# Altium PCB PCB2.PcbDoc (part 2 of 2)
Units mm, origin at the board's own origin, x right, y up, seen from the top; angles counter-clockwise.
Board outline 39.5 x 39.5 mm, 4 copper layers (Top Layer, Mid Layer 1, Mid Layer 2, Bottom Layer), stack 1.57 mm thick; 82 components, 63 nets, 381 pads, 150 vias.
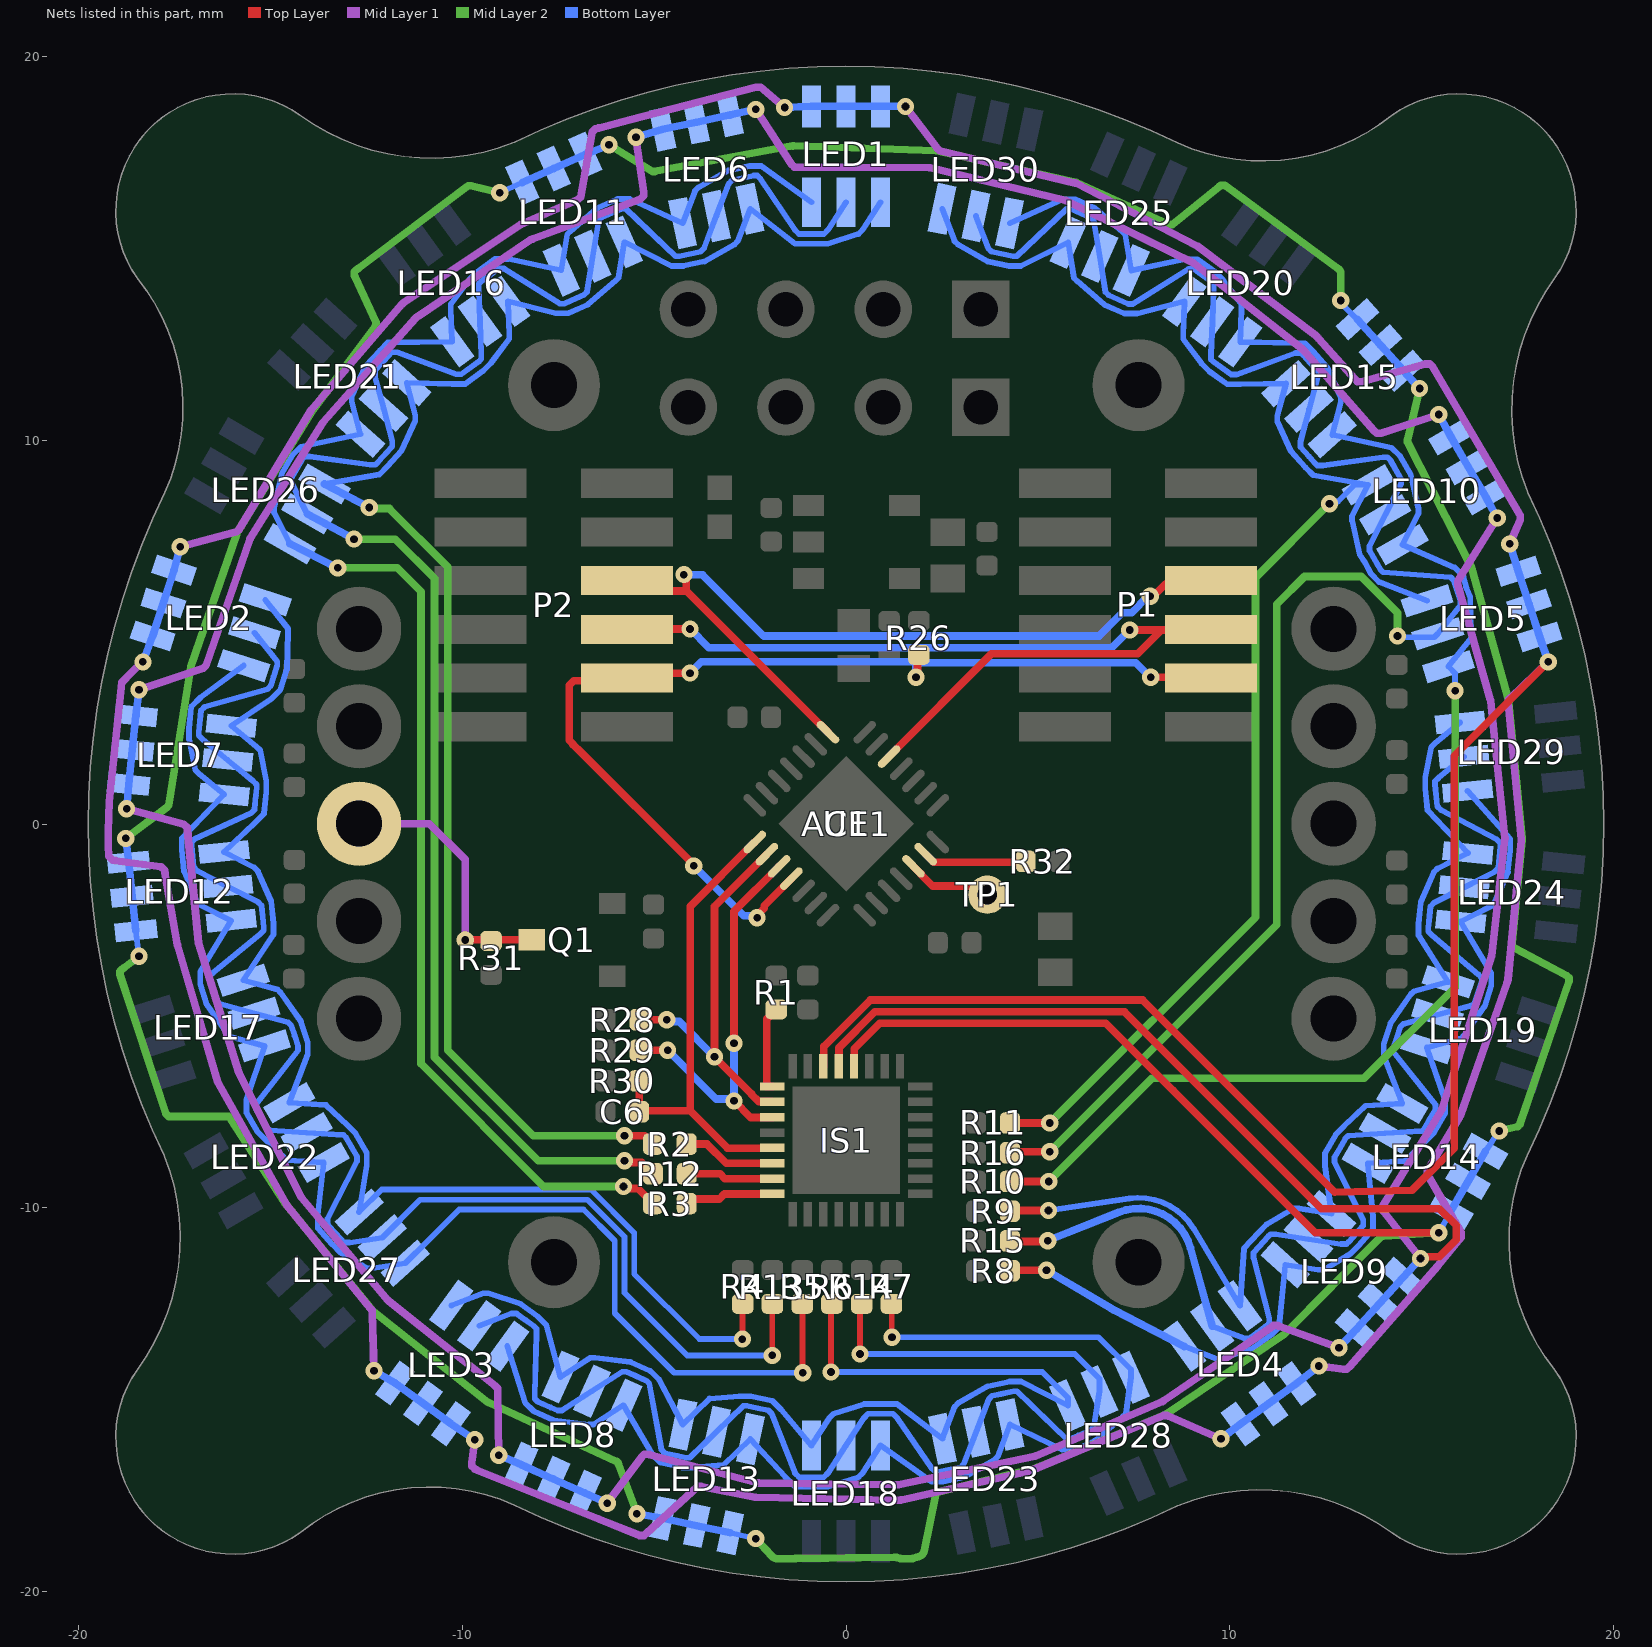
[diagram p4: the nets of this part, all layers, seen from the top]

## Via types
v1: diameter 0.45, hole 0.2, Top Layer to Bottom Layer, 136 vias
v2: diameter 5.5, hole 3, Top Layer to Bottom Layer, 4 vias
v3: diameter 0.5, hole 0.2, Top Layer to Bottom Layer, 4 vias
v4: diameter 0.66, hole 0.33, Top Layer to Bottom Layer, tented top, 4 vias
v5: diameter 0.6, hole 0.3, Top Layer to Bottom Layer, 1 vias
v6: diameter 0.7, hole 0.5, Top Layer to Bottom Layer, 1 vias

## Nets (pads, with @x,y where several pads share a name; then routed paths per layer and width w, separated by ;. In a path a pad name is that pad's centre, name@x,y a point inside that pad or via, vN(x,y) a via of type N, cw(c..) or ccw(c..) an arc to the next point about the centre after c; other vN are vias at no path point) (continued)
NetIS1_20: IS1.20 LED11.1 LED11.3 LED11.5 LED12.1 LED12.3 LED12.5 LED13.1 LED13.3 LED13.5 LED14.1 LED14.3 LED14.5 LED15.1 LED15.3 LED15.5 | length 141
  Top Layer w0.2: IS1.20@0.208,-6.317 0.218,-6.307 0.218,-5.854 0.88,-5.192 6.771,-5.192 8.52,-6.942 12.228,-10.65 v1(15.45,-10.65)
  Mid Layer 2 w0.2: v1(-18.775,-0.375) -17.698,0.439 -17.69,0.445 -17.648,0.487 -17.077,4.087 -17.075,4.1 -15.88,7.559 -15.875,7.575 -13.929,10.744 -13.925,10.75 -12.279,12.953 -12.249,12.993 -12.249,13.076 -12.799,14.265 -12.813,14.295 -12.813,14.39 -12.762,14.442 -12.713,14.478 -9.882,16.607 -9.842,16.637 -9.774,16.637 v1(-9.025,16.45) ; v1(-18.425,-3.45) -18.825,-3.754 -18.873,-3.791 -18.924,-3.842 -18.924,-3.929 -18.916,-3.952 -17.723,-7.556 -17.654,-7.625 -16.095,-7.625 -16.039,-7.68 -16.031,-7.694 -14.625,-9.875 -14.62,-9.881 -12.331,-12.693 -12.319,-12.705 -12.312,-12.71 -9.325,-15.075 -9.309,-15.083 -5.982,-16.61 -5.94,-16.653 -5.928,-16.683 v1(-5.45,-17.975) ; v1(-6.175,17.7) -5.074,17.03 -5.038,17.008 -4.982,17.008 -1.391,17.672 -1.377,17.675 -1.361,17.675 2.361,17.55 2.375,17.55 2.431,17.537 5.985,16.728 6,16.725 8.391,15.638 8.42,15.625 8.506,15.625 9.729,16.616 cw(c9.824,16.5) 9.913,16.62 12.835,14.466 cw(c12.747,14.344) 12.897,14.345 ; v1(-2.35,-18.625) -1.932,-19.085 ; -1.931,-19.085 ccw(c-1.784,-18.95) -1.782,-19.15 -1.769,-19.15 cw(c-1.766,-19.35) -1.757,-19.15 -1.717,-19.152 ccw(c-1.708,-18.952) -1.709,-19.152 -1.409,-19.152 ccw(c-1.409,-18.952) -1.39,-19.151 -1.326,-19.145 cw(c-1.307,-19.344) -1.309,-19.144 1.263,-19.111 cw(c1.266,-19.311) 1.321,-19.118 1.414,-19.145 ccw(c1.469,-18.952) 1.468,-19.152 1.68,-19.152 ccw(c1.68,-18.952) 1.743,-19.142 1.83,-19.113 cw(c1.894,-19.302) 1.845,-19.108 1.891,-19.097 ccw(c1.842,-18.903) 2.037,-18.944 2.34,-17.474 2.401,-17.412 2.442,-17.402 4.975,-16.775 4.985,-16.771 8.35,-15.375 8.362,-15.367 11.425,-13.3 11.435,-13.289 13.91,-10.79 13.95,-10.75 14.007,-10.746 v1(15.45,-10.65) ; v1(12.897,13.646) 12.897,14.344 ; v1(14.95,11.35) 14.638,10.029 14.634,10.012 14.634,9.958 16.293,6.713 16.3,6.7 16.31,6.666 17.271,3.213 17.275,3.2 17.277,3.18 17.624,-0.385 17.624,-0.393 17.624,-0.407 17.36,-3.099 17.359,-3.107 17.359,-3.176 17.419,-3.236 18.761,-3.94 18.781,-3.951 18.841,-4.011 18.841,-4.098 17.577,-7.797 17.565,-7.83 17.511,-7.884 v1(17.025,-8)
  Bottom Layer w0.15: LED12.1@-18.51,-2.783 v1(-18.425,-3.45) ; v1(-9.025,16.45) LED11.1@-8.438,16.717 ; LED13.1@-3.013,-18.473 v1(-2.35,-18.625) ; v1(12.897,13.646) 12.897,13.58 LED15.1@13.325,13.152 ; v1(15.45,-10.65) LED14.5@15.764,-10.093 ; LED14.1@16.664,-8.534 v1(17.025,-8)
  Bottom Layer w0.2: v1(-18.775,-0.375) LED12.5@-18.698,-0.993 LED12.3@-18.604,-1.888 LED12.1@-18.51,-2.783 ; LED11.1@-8.438,16.717 LED11.3@-7.615,17.083 LED11.5@-6.793,17.449 v1(-6.175,17.7) ; v1(-5.45,-17.975) LED13.5@-4.774,-18.099 LED13.3@-3.893,-18.286 LED13.1@-3.013,-18.473 ; LED15.1@13.325,13.152 LED15.3@13.927,12.483 LED15.5@14.53,11.814 v1(14.95,11.35) ; LED14.5@15.764,-10.093 LED14.3@16.214,-9.313 LED14.1@16.664,-8.534
NetIS1_21: IS1.21 LED6.1 LED6.3 LED6.5 LED7.1 LED7.3 LED7.5 LED8.1 LED8.3 LED8.5 LED9.1 LED9.3 LED9.5 LED10.1 LED10.3 LED10.5 | length 140.8
  Top Layer w0.2: IS1.21@-0.192,-6.317 -0.182,-6.307 -0.182,-5.827 0.755,-4.891 7.257,-4.891 12.391,-10.025 15.464,-10.025 15.902,-10.463 15.902,-10.837 15.462,-11.277 15.023,-11.277 v1(14.975,-11.325)
  Mid Layer 1 w0.2: v1(-18.75,0.4) -17.257,-0.003 -17.169,-0.091 -17.162,-0.163 -16.875,-3.1 -16.869,-3.12 -15.825,-6.475 -15.818,-6.49 -14.2,-9.725 -14.185,-9.743 -11.932,-12.416 -11.918,-12.43 -11.91,-12.437 -9.14,-14.648 -9.075,-14.713 -9.074,-14.794 v1(-9.05,-16.45) ; v1(-18.425,3.5) -16.793,4.044 -16.749,4.059 -16.683,4.125 -15.532,7.429 -15.525,7.45 -13.634,10.461 -13.625,10.475 -11.216,13.182 -11.213,13.186 -11.195,13.203 -11.129,13.249 -8.245,15.211 -8.225,15.225 -8.168,15.246 -5.401,16.269 -5.36,16.284 -5.271,16.374 -5.271,16.471 v1(-5.475,17.9) ; v1(-6.225,-17.7) -5.322,-16.496 -5.254,-16.428 -5.145,-16.428 -5.12,-16.434 -2.3,-17.175 -2.276,-17.175 1.247,-17.224 1.329,-17.225 1.351,-17.225 1.372,-17.22 4.925,-16.475 4.943,-16.467 8.25,-15.05 8.266,-15.039 11.142,-13.073 11.238,-13.073 11.271,-13.084 v1(12.85,-13.65) ; v1(-2.35,18.625) -1.434,17.215 -1.422,17.198 -1.349,17.125 2.177,17.1 2.2,17.1 5.704,16.255 5.725,16.25 9.031,14.634 9.05,14.625 9.076,14.604 11.885,12.387 11.894,12.379 11.908,12.366 ; 11.961,12.305 11.908,12.366 ; v1(14.975,-11.325) 13.993,-10.08 13.993,-9.954 14.023,-9.906 15.5,-7.49 15.525,-7.45 15.532,-7.428 16.804,-3.515 16.825,-3.45 16.827,-3.43 17.174,-0.385 17.174,-0.364 17.173,-0.353 16.803,3.197 16.8,3.225 16.795,3.242 15.942,6.241 15.942,6.327 15.972,6.375 v1(16.975,7.975) ; v1(15.45,10.675) 13.945,10.181 13.83,10.181 13.767,10.244 13.763,10.249 11.908,12.366
  Bottom Layer w0.2: v1(-18.75,0.4) LED7.1@-18.695,1.032 LED7.3@-18.601,1.927 LED7.5@-18.507,2.822 v1(-18.425,3.5) ; v1(-9.05,-16.45) LED8.5@-8.459,-16.7 LED8.3@-7.637,-17.066 LED8.1@-6.814,-17.432 v1(-6.225,-17.7) ; v1(-5.475,17.9) LED6.1@-4.777,18.106 LED6.3@-3.896,18.294 LED6.5@-3.016,18.481 v1(-2.35,18.625) ; v1(12.85,-13.65) LED9.5@13.308,-13.162 LED9.3@13.91,-12.494 LED9.1@14.513,-11.825 v1(14.975,-11.325) ; v1(15.45,10.675) LED10.1@15.77,10.089 LED10.3@16.22,9.309 LED10.5@16.67,8.53 v1(16.975,7.975)
NetIS1_22: IS1.22 LED1.1 LED1.3 LED1.5 LED2.1 LED2.3 LED2.5 LED3.1 LED3.3 LED3.5 LED4.1 LED4.3 LED4.5 LED5.1 LED5.3 LED5.5 | length 156.9
  Top Layer w0.2: IS1.22@-0.592,-6.317 -0.582,-6.307 -0.582,-5.801 0.63,-4.589 7.73,-4.589 12.741,-9.6 14.752,-9.548 15.85,-8.45 15.85,1.775 v1(18.3,4.225)
  Mid Layer 1 w0.2: v1(-18.325,4.225) -18.612,3.952 -18.877,3.687 -19.202,0.587 -19.227,-0.2 -19.227,-0.562 -19.216,-0.838 -19.11,-0.944 -19.043,-0.953 -17.853,-1.114 -17.761,-1.207 -17.75,-1.269 -17.425,-3.15 -17.422,-3.161 -16.375,-6.725 -16.364,-6.745 -14.575,-9.925 -14.564,-9.938 -12.35,-12.675 -12.348,-12.742 v1(-12.3,-14.25) ; v1(-17.35,7.225) -15.928,7.604 -15.876,7.618 -15.821,7.673 -13.959,10.761 -13.95,10.775 -11.568,13.554 -11.563,13.56 -11.543,13.579 -11.477,13.624 -8.49,15.615 -8.475,15.625 -7.023,16.257 -6.988,16.272 -6.917,16.344 -6.623,17.974 -6.612,18.036 -6.529,18.118 -6.451,18.138 -5.626,18.352 -2.35,19.199 -2.326,19.205 -2.227,19.205 v1(-1.6,18.675) ; v1(-9.675,-16.05) -9.744,-16.554 -9.756,-16.634 -9.756,-16.731 -9.668,-16.818 -9.63,-16.833 -6.453,-18.111 -5.455,-18.513 -5.381,-18.543 -5.264,-18.543 -5.207,-18.49 -3.868,-17.266 -3.77,-17.266 -3.75,-17.27 -2.375,-17.55 -2.357,-17.55 1.295,-17.623 1.378,-17.625 1.402,-17.625 1.424,-17.62 4.825,-16.85 4.841,-16.843 8.284,-15.417 8.365,-15.417 8.403,-15.433 v1(9.775,-16.025) ; v1(1.55,18.7) 2.382,17.607 2.39,17.596 2.439,17.547 5.976,16.706 6,16.7 9.16,15.058 9.175,15.05 9.199,15.032 12.235,12.737 12.246,12.728 12.259,12.715 12.314,12.654 13.267,11.592 13.271,11.588 13.333,11.526 13.443,11.526 15.077,11.984 15.103,11.991 15.214,11.991 15.29,11.914 15.331,11.846 17.548,8.087 17.576,8.04 17.576,7.945 v1(17.3,7.3) ; v1(12.325,-14.125) 12.877,-14.201 12.957,-14.212 13.053,-14.212 13.117,-14.149 13.121,-14.144 15.427,-11.512 16.031,-10.776 16.031,-10.648 16.004,-10.602 15.157,-9.131 15.157,-9.022 15.186,-8.974 15.977,-7.663 16,-7.625 16.007,-7.606 17.227,-4.141 17.25,-4.075 17.252,-4.051 17.599,-0.435 17.599,-0.415 17.598,-0.406 17.258,3.138 17.258,3.23 17.319,3.29 17.32,3.292 v1(18.3,4.225)
  Bottom Layer w0.2: v1(-18.325,4.225) LED2.1@-18.071,4.901 LED2.3@-17.793,5.757 LED2.5@-17.515,6.613 v1(-17.35,7.225) ; v1(-12.3,-14.25) LED3.5@-11.754,-14.571 LED3.3@-11.026,-15.1 LED3.1@-10.297,-15.629 v1(-9.675,-16.05) ; v1(-1.6,18.675) LED1.1@-0.9,18.704 LED1.3@0,18.704 LED1.5@0.9,18.704 v1(1.55,18.7) ; v1(9.775,-16.025) LED4.5@10.283,-15.639 LED4.3@11.011,-15.11 LED4.1@11.74,-14.581 v1(12.325,-14.125) ; v1(17.3,7.3) LED5.1@17.523,6.588 LED5.3@17.801,5.732 LED5.5@18.079,4.876 v1(18.3,4.225)
NetIS1_25: IS1.25 R1.1 | length 2.3
  Top Layer w0.2: IS1.25@-1.917,-6.842 -2.057,-6.842 -2.067,-6.832 -2.067,-5.082 -1.978,-4.993 -1.978,-4.99 -1.821,-4.832 R1.1@-1.817,-4.832
NetIS1_30: IS1.30 R2.1 | length 2.4
  Top Layer w0.2: R2.1@-4.152,-8.342 -3.622,-8.342 -3.122,-8.842 IS1.30@-1.917,-8.842
NetIS1_31: IS1.31 R12.1 | length 2.5
  Top Layer w0.2: R12.1@-4.152,-9.117 R12.1@-4.139,-9.117 ; R12.1@-4.147,-9.125 R12.1@-4.139,-9.117 ; R12.1@-3.999,-8.977 R12.1@-4.139,-9.117 ; IS1.31@-1.917,-9.242 -3.158,-9.242 -3.283,-9.117 R12.1@-4.139,-9.117
NetIS1_32: IS1.32 R3.1 | length 2.3
  Top Layer w0.2: R3.1@-4.152,-9.892 -4.035,-9.775 -3.3,-9.775 -3.167,-9.642 IS1.32@-1.917,-9.642
NetLED1_2: LED1.2 LED6.2 LED11.2 LED16.2 LED21.2 LED26.2 R3.2 | length 45.7
  Top Layer w0.2: v1(-5.8,-9.45) -5.752,-9.498 -5.422,-9.498 -5.032,-9.888 R3.2@-5.032,-9.892
  Mid Layer 2 w0.2: v1(-13.25,6.675) -11.7,6.675 -11.075,6.05 -11.075,-6.25 -7.875,-9.45 v1(-5.8,-9.45)
  Bottom Layer w0.15: LED26.2@-14.492,7.303 -14.906,8.118 -14.906,8.239 -14.708,9.122 -14.423,9.616 -14.207,9.832 LED21.2@-12.655,10.16 -12.88,11.005 -12.88,11.146 -12.529,11.919 -12.146,12.344 -11.944,12.546 LED16.2@-10.266,12.57 -10.299,13.42 -10.299,13.551 -9.822,14.184 -9.613,14.393 -9.151,14.729 -8.812,14.729 LED11.2@-7.421,14.433 -7.268,15.364 -7.193,15.439 -6.475,16.057 -5.954,16.289 -5.635,16.289 LED6.2@-4.257,15.661 -3.933,16.505 -3.844,16.594 -3.068,17.033 -2.51,17.151 -2.21,17.151 LED1.2@-0.9,16.204
  Bottom Layer w0.2: LED26.2@-14.492,7.303 v1(-13.25,6.675)
NetLED1_4: LED1.4 LED6.4 LED11.4 LED16.4 LED21.4 LED26.4 R12.2 | length 49.4
  Top Layer w0.2: v1(-5.775,-8.775) -5.727,-8.823 -5.326,-8.823 -5.193,-8.956 -5.19,-8.956 -5.032,-9.113 R12.2@-5.032,-9.117
  Mid Layer 2 w0.2: v1(-12.825,7.425) -11.75,7.425 -10.725,6.4 -10.725,-6.075 -8.025,-8.775 v1(-5.775,-8.775)
  Bottom Layer w0.15: LED26.4@-14.042,8.083 -14.456,8.898 -14.456,9.018 -14.171,9.512 -14.103,9.58 -13.982,9.58 -12.407,9.362 -12.266,9.362 -12.211,9.417 -11.828,9.843 -11.828,9.984 LED21.4@-12.053,10.829 -12.277,11.673 -12.277,11.814 -11.894,12.24 -11.839,12.295 -11.698,12.295 -10.159,11.72 -10.029,11.72 -9.567,12.056 -9.505,12.117 -9.505,12.248 LED16.4@-9.538,13.099 -9.571,13.949 -9.571,14.08 -9.509,14.141 -9.312,14.285 -9.047,14.477 -8.917,14.477 -7.458,13.561 -7.347,13.561 -7.145,13.651 -6.826,13.793 -6.751,13.868 LED11.4@-6.599,14.799 -6.446,15.731 -6.371,15.805 -5.85,16.037 -5.739,16.037 -4.44,14.797 -4.348,14.797 -3.789,14.915 -3.701,15.004 LED6.4@-3.377,15.848 -3.053,16.692 -2.964,16.781 -2.405,16.9 -2.314,16.9 -2.225,16.811 -1.327,15.481 -1.223,15.377 -0.577,15.377 -0.473,15.481 LED1.4@0,16.204
  Bottom Layer w0.2: LED26.4@-14.042,8.083 v1(-12.825,7.425)
NetLED1_6: LED1.6 LED6.6 LED11.6 LED16.6 LED21.6 LED26.6 R2.2 | length 43.8
  Top Layer w0.2: v1(-5.775,-8.125) -5.249,-8.125 R2.2@-5.032,-8.342
  Mid Layer 2 w0.2: v1(-12.425,8.25) -12.396,8.221 -11.9,8.221 -10.377,6.698 -10.377,-5.898 -8.15,-8.125 v1(-5.775,-8.125)
  Bottom Layer w0.15: LED26.6@-13.592,8.862 -12.162,9.111 -11.959,9.313 -11.576,9.739 -11.226,10.512 -11.226,10.653 LED21.6@-11.45,11.497 -10.264,11.469 -9.925,11.469 -9.463,11.804 -9.254,12.013 -8.777,12.646 -8.777,12.777 LED16.6@-8.81,13.628 -7.562,13.309 -7.243,13.309 -6.722,13.541 -6.004,14.159 -5.929,14.234 LED11.6@-5.776,15.165 -4.544,14.545 -4.244,14.545 -3.685,14.664 -2.909,15.103 -2.82,15.191 LED6.6@-2.496,16.035 -1.327,15.126 -0.473,15.126 0.323,15.377 0.427,15.481 LED1.6@0.9,16.204
  Bottom Layer w0.2: LED26.6@-13.592,8.862 v1(-12.425,8.25)
NetLED2_2: LED2.2 LED7.2 LED12.2 LED17.2 LED22.2 LED27.2 R5.2 | length 37.6
  Top Layer w0.15: R5.2@-1.142,-12.507 -1.134,-12.516 -1.134,-14.291 v1(-1.125,-14.3)
  Bottom Layer w0.15: LED2.2@-15.694,4.129 -16.818,3.305 -17.061,3.062 -17.121,2.493 -17.121,2.203 -16.964,1.412 -16.868,1.316 LED7.2@-16.209,0.771 -17.313,-0.374 -17.313,-0.665 -17.253,-1.233 -16.907,-2.024 -16.811,-2.12 LED12.2@-16.024,-2.522 -16.832,-3.859 -16.832,-4.169 -16.656,-4.711 -16.126,-5.463 -16.045,-5.544 LED17.2@-15.152,-5.785 -15.625,-7.196 -15.625,-7.525 -15.34,-8.019 -15.124,-8.235 -14.57,-8.763 LED22.2@-13.609,-8.824 -13.768,-10.185 -13.768,-10.534 -13.385,-10.959 -13.183,-11.162 -12.477,-11.579 -12.336,-11.579 LED27.2@-11.485,-11.45 -10.91,-10.875 -10.08,-10.045 -6.839,-10.045 -6.025,-10.859 -6.025,-12.75 -5.425,-13.35 -4.475,-14.3 v1(-1.125,-14.3)
NetLED2_4: LED2.4 LED7.4 LED12.4 LED17.4 LED22.4 LED27.4 R13.2 | length 40.6
  Top Layer w0.15: v1(-1.925,-13.85) -1.921,-13.846 -1.921,-12.511 R13.2@-1.917,-12.507
  Bottom Layer w0.15: LED2.4@-15.415,4.984 -14.821,4.239 -14.821,4.137 -14.918,3.84 -14.998,3.595 -15.079,3.513 -16.714,3.054 -16.81,2.958 -16.87,2.389 -16.87,2.307 -16.774,2.211 LED7.4@-16.115,1.666 -15.455,1.12 -15.359,1.024 -15.359,0.942 -15.38,0.743 -15.419,0.373 -15.515,0.277 -16.965,-0.382 -17.061,-0.478 -17.061,-0.56 -17.001,-1.129 -16.905,-1.225 LED12.4@-16.118,-1.627 -15.33,-2.029 -15.234,-2.125 -15.203,-2.417 -15.174,-2.693 -15.174,-2.776 -15.27,-2.872 -16.499,-3.882 -16.581,-3.963 -16.581,-4.064 -16.405,-4.607 -16.323,-4.689 LED17.4@-15.431,-4.929 -14.538,-5.17 -14.457,-5.252 -14.371,-5.516 -14.28,-5.794 -14.28,-5.895 -15.374,-7.301 -15.374,-7.421 -15.088,-7.915 -15.02,-7.983 LED22.4@-14.059,-8.045 -13.098,-8.106 -13.03,-8.174 -12.889,-8.418 -12.745,-8.668 -12.745,-8.789 -13.517,-10.289 -13.517,-10.43 -13.361,-10.603 -13.134,-10.855 -13.079,-10.91 -12.938,-10.91 LED27.4@-12.088,-10.782 -11.1,-9.794 -6.734,-9.794 -5.773,-10.755 -5.773,-12.216 -4.137,-13.852 -1.927,-13.852 v1(-1.925,-13.85)
NetLED2_6: LED2.6 LED7.6 LED12.6 LED17.6 LED22.6 LED27.6 R4.2 | length 34.2
  Top Layer w0.15: v1(-2.7,-13.425) -2.696,-13.421 -2.696,-12.511 R4.2@-2.692,-12.507
  Bottom Layer w0.15: LED2.6@-15.137,5.84 -14.543,5.095 -14.543,4.993 -14.57,4.033 -14.746,3.491 -14.975,3.262 LED7.6@-16.02,2.561 -15.361,2.015 -15.265,1.919 -15.108,1.129 -15.108,0.838 -15.168,0.269 -15.411,0.026 LED12.6@-16.212,-0.732 -15.424,-1.134 -15.328,-1.23 -14.983,-2.02 -14.923,-2.589 -14.923,-2.88 LED17.6@-15.709,-4.073 -14.817,-4.314 -14.735,-4.396 -14.205,-5.147 -14.029,-5.69 -14.029,-5.999 LED22.6@-14.509,-7.265 -13.548,-7.326 -12.994,-7.854 -12.778,-8.07 -12.493,-8.564 -12.493,-8.893 LED27.6@-12.69,-10.113 -12.102,-9.525 -6.647,-9.525 -5.522,-10.651 -5.522,-11.725 -3.822,-13.425 v1(-2.7,-13.425)
NetLED3_2: LED3.2 LED8.2 LED13.2 LED18.2 LED23.2 LED28.2 R7.2 | length 29.8
  Top Layer w0.15: R7.2@1.183,-12.507 1.192,-12.516 1.192,-13.367 v1(1.2,-13.375)
  Bottom Layer w0.15: LED3.2@-8.828,-13.606 -8.363,-15.085 -8.141,-15.307 -7.62,-15.539 -6.693,-15.654 -6.583,-15.654 LED8.2@-5.798,-15.148 -5.062,-16.415 -4.826,-16.651 -4.267,-16.77 -3.967,-16.77 -3.191,-16.705 LED13.2@-2.493,-16.028 -1.578,-17.023 -1.327,-17.274 -0.473,-17.274 0.323,-17.023 0.427,-16.919 LED18.2@0.9,-16.196 2.227,-17.14 2.527,-17.14 3.086,-17.021 3.862,-16.582 3.95,-16.493 LED23.2@4.274,-15.649 5.632,-16.303 5.972,-16.303 6.493,-16.071 7.215,-15.449 7.3,-15.364 LED28.2@7.428,-14.422 7.428,-14.219 6.584,-13.375 v1(1.2,-13.375)
NetLED3_4: LED3.4 LED8.4 LED13.4 LED18.4 LED23.4 LED28.4 R14.2 | length 34.3
  Top Layer w0.15: v1(0.367,-13.813) 0.367,-12.548 R14.2@0.408,-12.507
  Bottom Layer w0.15: LED3.4@-9.556,-13.077 -8.721,-12.757 -8.591,-12.757 -8.355,-12.928 -8.129,-13.093 -8.067,-13.154 -8.067,-13.285 -8.111,-14.87 -8.111,-14.981 -8.036,-15.056 -7.697,-15.207 -7.515,-15.288 -7.405,-15.288 LED8.4@-6.62,-14.782 -5.835,-14.276 -5.724,-14.276 -5.486,-14.382 -5.203,-14.508 -5.128,-14.583 -4.81,-16.311 -4.722,-16.399 -4.4,-16.468 -4.163,-16.518 -4.071,-16.518 LED13.4@-3.374,-15.841 -2.676,-15.164 -2.584,-15.164 -2.297,-15.225 -2.026,-15.282 -1.937,-15.371 -1.327,-16.919 -1.223,-17.023 -0.577,-17.023 -0.473,-16.919 LED18.4@0,-16.196 0.473,-15.473 0.577,-15.369 1.223,-15.369 1.327,-15.473 2.243,-16.799 2.331,-16.888 2.423,-16.888 2.981,-16.769 3.07,-16.681 LED23.4@3.394,-15.836 3.718,-14.992 3.807,-14.904 4.039,-14.854 4.365,-14.785 4.457,-14.785 5.747,-16.026 5.857,-16.026 6.051,-15.94 6.378,-15.794 6.453,-15.719 LED28.4@6.606,-14.788 6.606,-14.456 5.963,-13.813 v1(0.367,-13.813)
NetLED3_6: LED3.6 LED8.6 LED13.6 LED18.6 LED23.6 LED28.6 R6.2 | length 29.3
  Top Layer w0.15: v1(-0.392,-14.284) -0.392,-12.532 R6.2@-0.367,-12.507
  Bottom Layer w0.15: LED3.6@-10.284,-12.548 -9.449,-12.228 -9.319,-12.228 -8.487,-12.505 -8.024,-12.841 -7.815,-13.05 LED8.6@-7.442,-14.416 -6.657,-13.91 -6.546,-13.91 -5.62,-14.024 -5.099,-14.256 -4.877,-14.478 LED13.6@-4.254,-15.654 -3.556,-14.976 -2.78,-14.912 -2.48,-14.912 -1.922,-15.031 -1.685,-15.267 LED18.6@-0.9,-16.196 -0.427,-15.473 -0.323,-15.369 0.473,-15.118 1.327,-15.118 LED23.6@2.514,-16.024 2.838,-15.179 2.927,-15.091 3.703,-14.652 4.261,-14.533 4.561,-14.533 LED28.6@5.784,-15.154 5.784,-14.951 5.116,-14.284 v1(-0.392,-14.284)
NetLED4_2: LED4.2 LED9.2 LED14.2 LED19.2 LED24.2 LED29.2 R9.2 | length 28.4
  Top Layer w0.2: R9.2@4.273,-10.092 4.292,-10.073 v1(5.278,-10.073)
  Bottom Layer w0.15: v1(5.278,-10.073) 7.381,-9.762 cw(c7.628,-11.422) 9.067,-10.559 LED4.2@10.27,-12.559 10.372,-11.068 10.755,-10.643 10.957,-10.441 11.664,-10.023 11.805,-10.023 LED9.2@12.655,-10.152 12.482,-8.911 12.482,-8.583 12.768,-8.088 12.983,-7.873 13.537,-7.345 LED14.2@14.499,-7.284 14.015,-6.042 14.015,-5.732 14.191,-5.19 14.721,-4.438 14.803,-4.356 LED19.2@15.695,-4.116 14.921,-2.902 14.921,-2.611 14.98,-2.043 15.326,-1.252 15.422,-1.156 LED24.2@16.21,-0.754 15.158,0.356 15.099,0.925 15.099,1.216 15.256,2.007 15.352,2.103 LED29.2@16.011,2.648
NetLED4_4: LED4.4 LED9.4 LED14.4 LED19.4 LED24.4 LED29.4 R15.2 | length 33.6
  Top Layer w0.2: R15.2@4.273,-10.867 4.286,-10.88 5.241,-10.88 v1(5.261,-10.859)
  Bottom Layer w0.15: LED4.4@9.542,-13.088 10.377,-13.408 10.507,-13.408 10.728,-13.248 10.969,-13.072 11.031,-13.011 11.031,-12.88 10.623,-11.314 10.623,-11.173 10.758,-11.023 11.006,-10.747 11.061,-10.692 11.202,-10.692 LED9.4@12.053,-10.821 12.903,-10.949 13.044,-10.949 13.099,-10.894 13.482,-10.469 13.482,-10.328 12.734,-8.807 12.734,-8.687 12.856,-8.475 13.019,-8.193 13.087,-8.124 LED14.4@14.049,-8.063 15.01,-8.002 15.078,-7.934 15.21,-7.704 15.363,-7.44 15.363,-7.319 14.267,-5.938 14.267,-5.837 14.351,-5.577 14.443,-5.294 14.525,-5.212 LED19.4@15.417,-4.972 16.309,-4.731 16.391,-4.649 16.502,-4.308 16.567,-4.107 16.567,-4.006 16.485,-3.924 15.268,-2.894 15.172,-2.798 15.172,-2.716 15.205,-2.404 15.232,-2.147 15.328,-2.051 LED24.4@16.115,-1.649 16.903,-1.247 16.999,-1.151 17.059,-0.583 17.059,-0.5 16.963,-0.404 15.506,0.365 15.41,0.461 15.35,1.029 15.35,1.112 15.446,1.208 LED29.4@16.105,1.753
  Bottom Layer w0.2: v1(5.261,-10.859) 7.107,-10.121 cw(c7.628,-11.422) 8.979,-11.05 LED4.4@9.542,-13.088
NetLED4_6: LED4.6 LED9.6 LED14.6 LED19.6 LED24.6 LED29.6 R8.2 | length 27.1
  Top Layer w0.2: R8.2@4.273,-11.642 4.298,-11.667 4.332,-11.633 v1(5.226,-11.633)
  Bottom Layer w0.15: LED4.6@8.814,-13.617 9.649,-13.937 9.779,-13.937 10.611,-13.66 11.074,-13.324 11.283,-13.115 LED9.6@11.45,-11.49 12.3,-11.618 12.441,-11.618 13.148,-11.201 13.35,-10.999 13.733,-10.573 13.733,-10.224 LED14.6@13.599,-8.843 14.56,-8.781 15.114,-8.253 15.329,-8.038 15.615,-7.544 15.615,-7.215 LED19.6@15.139,-5.828 16.031,-5.587 16.113,-5.505 16.642,-4.753 16.819,-4.211 16.819,-3.901 LED24.6@16.021,-2.544 16.809,-2.142 16.905,-2.046 17.251,-1.256 17.31,-0.687 17.31,-0.396 LED29.6@16.199,0.858
  Bottom Layer w0.2: v1(5.226,-11.633) 6.916,-12.629 ccw(c7.628,-11.422) 6.982,-12.666 LED4.6@8.814,-13.617
NetLED5_2: LED5.2 LED10.2 LED15.2 LED20.2 LED25.2 LED30.2 R11.2 | length 42.3
  Top Layer w0.2: R11.2@4.273,-7.792 v1(5.308,-7.792)
  Mid Layer 2 w0.2: v1(5.308,-7.792) 10.675,-2.425 10.675,6.425 v1(12.6,8.35)
  Bottom Layer w0.15: LED30.2@2.506,16.033 2.83,15.189 2.919,15.1 3.695,14.662 4.253,14.543 4.553,14.543 LED25.2@5.79,15.159 5.943,14.228 6.017,14.153 6.735,13.535 7.256,13.304 7.575,13.304 LED20.2@8.821,13.62 8.788,12.769 8.788,12.638 9.265,12.005 9.473,11.796 9.936,11.461 10.275,11.461 LED15.2@11.467,11.479 11.243,10.634 11.243,10.493 11.593,9.72 11.976,9.295 12.179,9.092 LED10.2@13.605,8.839 ; v1(12.6,8.35) 12.657,8.407 12.821,8.407 13.253,8.839 LED10.2@13.605,8.839 ; LED5.2@15.145,5.816 13.89,6.31 13.674,6.526 13.529,6.814 13.527,6.818 13.515,6.838 13.389,7.02 13.191,7.904 13.191,8.024 LED10.2@13.605,8.839
NetLED5_4: LED5.4 LED10.4 LED15.4 LED20.4 LED25.4 LED30.4 R16.2 | length 49.4
  Top Layer w0.2: R16.2@4.273,-8.567 4.298,-8.542 v1(5.308,-8.542)
  Mid Layer 2 w0.2: v1(5.308,-8.542) 11.225,-2.625 11.225,5.725 11.95,6.45 13.425,6.45 14.375,5.5 v1(14.375,4.9)
  Bottom Layer w0.15: LED30.4@3.386,15.846 3.71,15.002 3.799,14.913 4.358,14.795 4.449,14.795 5.753,16.031 5.863,16.031 6.384,15.799 6.459,15.725 LED25.4@6.612,14.793 6.765,13.862 6.84,13.787 7.361,13.555 7.471,13.555 8.927,14.469 9.058,14.469 9.52,14.133 9.582,14.072 9.582,13.941 LED20.4@9.549,13.091 9.516,12.24 9.516,12.109 9.578,12.048 10.04,11.712 10.17,11.712 11.715,12.276 11.856,12.276 11.911,12.221 12.294,11.796 12.294,11.655 LED15.4@12.069,10.81 11.845,9.965 11.845,9.824 12.067,9.578 12.228,9.399 12.283,9.344 12.424,9.344 13.996,9.557 14.116,9.557 14.185,9.489 14.47,8.995 14.47,8.874 LED10.4@14.055,8.059 13.641,7.245 13.641,7.124 13.85,6.762 13.926,6.63 13.994,6.562 15.759,6.431 15.841,6.349 15.932,6.069 16.017,5.807 16.017,5.706 LED5.4@15.423,4.96 15.332,4.868 14.407,4.868 v1(14.375,4.9)
NetLED5_6: LED5.6 LED10.6 LED15.6 LED20.6 LED25.6 LED30.6 R10.2 | length 44.1
  Top Layer w0.2: R10.2@4.273,-9.317 v1(5.283,-9.317)
  Mid Layer 2 w0.2: v1(5.283,-9.317) 7.975,-6.625 13.5,-6.625 15.875,-4.25 v1(15.875,3.475)
  Bottom Layer w0.15: LED30.6@4.267,15.659 5.648,16.283 5.967,16.283 6.488,16.051 7.206,15.433 7.281,15.359 LED25.6@7.434,14.427 8.823,14.721 9.162,14.721 9.624,14.385 9.833,14.176 10.31,13.543 10.31,13.412 LED20.6@10.277,12.562 11.96,12.528 12.163,12.325 12.546,11.9 12.896,11.127 12.896,10.986 LED15.6@12.672,10.141 14.221,9.809 14.436,9.593 14.721,9.099 14.92,8.215 14.92,8.095 LED10.6@14.505,7.28 15.864,6.683 16.093,6.454 16.162,6.174 16.172,6.146 16.174,6.141 16.269,5.911 16.295,4.951 16.295,4.85 LED5.6@15.701,4.104 15.875,3.93 v1(15.875,3.475)
NetR32_2: R32.2 U1.6 | length 2.7
  Top Layer w0.2: U1.6@2.076,-0.787 2.289,-1 4.66,-1 R32.2@4.685,-0.975
NetTP1_1: TP1.1 U1.5 | length 1.9
  Top Layer w0.2: U1.5@1.756,-1.104 1.953,-1.3 1.953,-1.312 2.257,-1.617 3.233,-1.617 TP1.1@3.383,-1.767
  other v6: 3.683,-1.842
R\E\S\E\T\: P1.10 P2.10 R26.2 U1.25 | length 27.9
  Top Layer w0.2: v1(-4.067,3.933) -5.582,3.933 -5.78,3.735 -7.1,3.735 -7.217,3.617 -7.217,2.183 -7.114,2.08 -7.114,2.069 -6.996,1.951 -6.985,1.951 -3.967,-1.067 v1(-3.967,-1.092) ; v1(-2.317,-2.442) -2.317,-2.388 -2.129,-2.2 -2.129,-2.129 U1.25@-1.424,-1.424 ; v1(1.825,3.825) 1.862,3.862 1.862,4.373 R26.2@1.9,4.41 ; v1(7.94,3.822) 9.241,3.822 9.252,3.833 9.271,3.814 P1.10@9.525,4.068
  Bottom Layer w0.2: v1(-4.067,3.933) -3.775,4.225 1.859,4.225 ; v1(-3.967,-1.092) -2.665,-2.394 -2.365,-2.394 v1(-2.317,-2.442) ; v1(1.825,3.825) 1.825,4.191 1.834,4.2 7.55,4.2 7.928,3.822 v1(7.94,3.822)
S1: ACE1.3 Q1.3 R31.2 | length 7
  Top Layer w0.2: v1(-9.925,-3.025) -9.917,-3.017 Q1.3@-8.192,-3.017
  Mid Layer 1 w0.2: ACE1.3@-12.692,0.008 -10.858,0.008 -9.925,-0.925 v1(-9.925,-3.025)
S\S\: P1.8 P2.8 U1.12 | length 23.8
  Top Layer w0.2: P2.8@-5.715,5.084 v1(-4.064,5.084) ; U1.12@1.114,1.754 3.793,4.433 7.604,4.433 8.229,5.058 ; v1(7.392,5.058) 8.229,5.058 ; P1.8@9.245,5.058 8.229,5.058
  Bottom Layer w0.2: v1(-4.064,5.084) -3.576,4.596 6.93,4.596 v1(7.392,5.058)
SCK: P1.6 P2.6 U1.15 | length 23.7
  Top Layer w0.2: P2.6@-5.712,6.343 -5.432,6.063 -4.15,6.063 ; P2.6@-5.435,6.074 -4.161,6.074 ; v1(-4.225,6.5) -4.161,6.436 -4.161,6.074 ; U1.15@-0.469,2.394 -0.664,2.589 -0.676,2.589 -4.15,6.063 ; v1(7.933,5.933) 8.008,5.933 8.693,6.618 P1.6@9.513,6.618 ; -4.161,6.074 -4.15,6.063
  Bottom Layer w0.2: v1(-4.225,6.5) -3.741,6.5 -2.139,4.898 6.593,4.898 7.205,5.51 7.442,5.51 7.865,5.933 v1(7.933,5.933)
SCL: IS1.27 R29.2 U1.24 | length 10.8
  Top Layer w0.2: R29.2@-5.385,-5.9 v1(-4.65,-5.9) ; v1(-2.921,-5.711) -2.921,-2.281 U1.24@-1.75,-1.11 ; v1(-2.917,-7.217) -2.483,-7.651 IS1.27@-1.925,-7.651
  Bottom Layer w0.2: v1(-4.65,-5.9) -3.381,-7.169 -2.965,-7.169 v1@-2.919,-7.215 ; v1(-2.921,-5.711) -2.919,-5.713 v1@-2.919,-7.215 ; v1(-2.917,-7.217) v1@-2.919,-7.215
SDA: IS1.26 R28.2 U1.23 | length 10.2
  Top Layer w0.2: R28.2@-5.373,-5.112 R28.2@-5.385,-5.1 v1(-4.675,-5.1) ; U1.23@-2.068,-0.791 -3.429,-2.152 v1(-3.429,-6.066) -2.465,-7.03 -2.465,-7.044 -2.277,-7.232 -1.944,-7.232 IS1.26@-1.925,-7.251
  Bottom Layer w0.2: v1@-4.65,-5.1 -4.602,-5.148 -4.347,-5.148 v1(-3.429,-6.066)
SDB: C6.1 IS1.29 R30.1 U1.22 | length 12.4
  Top Layer w0.2: R30.1@-5.391,-6.698 C6.1@-5.391,-7.498 -5.368,-7.475 -4.063,-7.475 ; U1.22@-2.386,-0.473 -4.063,-2.149 -4.063,-7.475 ; IS1.29@-1.925,-8.451 -3.086,-8.451 -4.063,-7.475
pads on no net: ACE1. ACE1.8 IS1.14 IS1.15 IS1.16 LD1.4 U1.2 U1.7 U1.26 U1.27 U1.28
copper on no net:
  other v2: -16,-16 16,-16 -16,16 16,16

## Polygon pours and split planes (outlines as drawn)
GND on Mid Layer 1 "NONET_L-01_P-001" (solid, remove dead copper, shelved, pour order 10): -0.117,22.808 -5.892,21.833 -10.342,20.183 -14.242,17.783 -17.842,14.308 -20.467,10.083 -21.967,5.883 -22.692,1.083 -22.417,-3.842 -21.067,-8.392 -19.142,-12.617 -16.242,-16.092 -12.342,-19.217 -7.867,-21.292 -3.092,-22.517 1.583,-22.767 6.433,-21.842 10.758,-20.067 14.833,-17.217 18.033,-13.917 20.608,-9.592 22.233,-5.292 22.833,-0.642 22.408,4.108 21.183,8.383 18.933,12.683 15.783,16.258 12.108,19.233 7.783,21.383 3.458,22.583
no net on Mid Layer 1 "NONET_L-01_P-001" (solid, remove dead copper, shelved, pour order 11): 32.408,10.483
no net on Mid Layer 1 "NONET_L-01_P-001" (solid, remove dead copper, shelved, pour order 9): -22.992,22.533
no net on Mid Layer 1 "NONET_L-01_P-001" (solid, remove dead copper, shelved, pour order 8): -22.167,22.208
+3.3V on Mid Layer 2 "NONET_L-01_P-001" (solid, remove dead copper, shelved, pour order 17): 23.575,5.3
+3.3V on Mid Layer 2 "NONET_L-01_P-001" (solid, remove dead copper, shelved, pour order 16): -13.821,8.95 -13.821,-10.504 -7.114,-17.211 7.564,-17.211 13.875,-10.9 13.875,8.944 13.869,8.95
+5 on Mid Layer 2 "NONET_L-01_P-001" (solid, remove dead copper, shelved, pour order 12): -17.842,14.308 -21.171,8.95 20.886,8.95 18.933,12.683 15.783,16.258 12.108,19.233 7.783,21.383 3.458,22.583 -0.117,22.808 -5.892,21.833 -10.342,20.183 -14.242,17.783
GND on Bottom Layer "NONET_L-01_P-001" (solid, remove dead copper, shelved, pour order 14): -0.117,22.808 -5.892,21.833 -10.342,20.183 -14.242,17.783 -17.842,14.308 -20.467,10.083 -21.967,5.883 -22.692,1.083 -22.417,-3.842 -21.067,-8.392 -19.142,-12.617 -16.242,-16.092 -12.342,-19.217 -7.867,-21.292 -3.092,-22.517 1.583,-22.767 6.433,-21.842 10.758,-20.067 14.833,-17.217 18.033,-13.917 20.608,-9.592 22.233,-5.292 22.833,-0.642 22.408,4.108 21.183,8.383 18.933,12.683 15.783,16.258 12.108,19.233 7.783,21.383 3.458,22.583
GND on Top Layer "NONET_L-01_P-001" (solid, remove dead copper, shelved, pour order 15): -0.117,22.808 -5.892,21.833 -10.342,20.183 -14.242,17.783 -17.842,14.308 -20.467,10.083 -21.967,5.883 -22.692,1.083 -22.417,-3.842 -21.067,-8.392 -19.142,-12.617 -16.242,-16.092 -12.342,-19.217 -7.867,-21.292 -3.092,-22.517 1.583,-22.767 6.433,-21.842 10.758,-20.067 14.833,-17.217 18.033,-13.917 20.608,-9.592 22.233,-5.292 22.833,-0.642 22.408,4.108 21.183,8.383 18.933,12.683 15.783,16.258 12.108,19.233 7.783,21.383 3.458,22.583

## Silkscreen, mask and mechanical layers (free items; w line width, h text height)
Top Overlay:
  circle w0.254: c-5.592,-9.892 r0.06
  circle w0.254: c-1.142,-13.042 r0.06
  circle w0.254: c1.208,-13.042 r0.06
  circle w0.254: c4.818,-10.092 r0.06
  circle w0.254: c4.808,-7.792 r0.06
  text "DOUT" at -9.613,0.762 h1
  text "DIN" at 6.462,0.762 h1
Mechanical 1:
  lines w0.2: -16.825,-16.05 -16.65,-16.05 -16.05,-16.65 ; 16.05,-16.825 16.05,-16.65 16.65,-16.05 ; 16.05,16.65 16.65,16.05 16.825,16.05 ; -18.471,-14.229 ccw(c-15.987,-15.987) -14.229,-18.471 cw(c-10.848,-22.668) -8.639,-17.753 ccw(c0.016,0) 8.645,-17.765 cw(c10.799,-23.162) 14.229,-18.471 ccw(c15.987,-15.987) 18.471,-14.229 cw(c22.668,-10.848) 17.753,-8.638 ccw(c0,0.016) 17.765,8.645 cw(c23.162,10.799) 18.471,14.229 ccw(c15.987,15.987) 14.229,18.471 cw(c10.848,22.668) 8.639,17.753 ccw(c-0.016,0) -8.645,17.765 cw(c-10.799,23.162) -14.229,18.471 ccw(c-15.987,15.987) -18.471,14.229 cw(c-22.668,10.848) -17.753,8.639 ccw(c0,-0.016) -17.765,-8.645 cw(c-23.162,-10.799) -18.471,-14.229
Mechanical 15:
  lines w0.2: -19.917,-2.017 0.011,0.005 ; -19.892,2.058 0.003,0.004 ; -19.042,-6.092 0,0.009 ; -19.042,6.158 0.01,0.006 ; -17.367,-9.942 0.012,-0.007 ; -17.342,9.983 0.01,0.006 ; -14.917,-13.317 -0.012,0.006 ; -14.867,13.358 0.004,0.006 -4.167,-19.567 ; -11.792,-16.142 0.013,0.003 -8.142,18.258 ; -11.767,16.158 0.015,0.01 ; -8.167,-18.242 0.004,-0.009 ; -4.167,19.558 0.004,0.004 ; 0,0.016 0.016,0.016 4.183,-19.542 ; 0.012,0.004 14.883,-13.367 ; 4.183,19.583 0.003,0.004 ; 8.158,-18.267 0,0 ; 8.158,18.258 0.003,0.004 ; 11.783,-16.167 0.004,0.004 ; 11.783,16.158 0,0 ; 14.908,13.358 0.01,0.006 ; 17.358,-9.967 0,0 ; 17.358,9.958 0.004,0.004 ; 19.033,-6.142 0.004,0.004 ; 19.058,6.133 0.004,0.004 ; 19.883,2.158 0.004,0.004 ; 19.908,-2.042 0.004,0.004
  lines w0.254: -19.939,0.004 0,0.004 ; 0,-19.935 0,0.004 ; 0,19.943 0,0.004 ; 19.783,0.004 0,0.004
Mechanical 19:
  circle w0.254: c0,0.004 r17.5